# EAGLE board alu2 2 (EAGLE 7.5.0), part 1 of 2
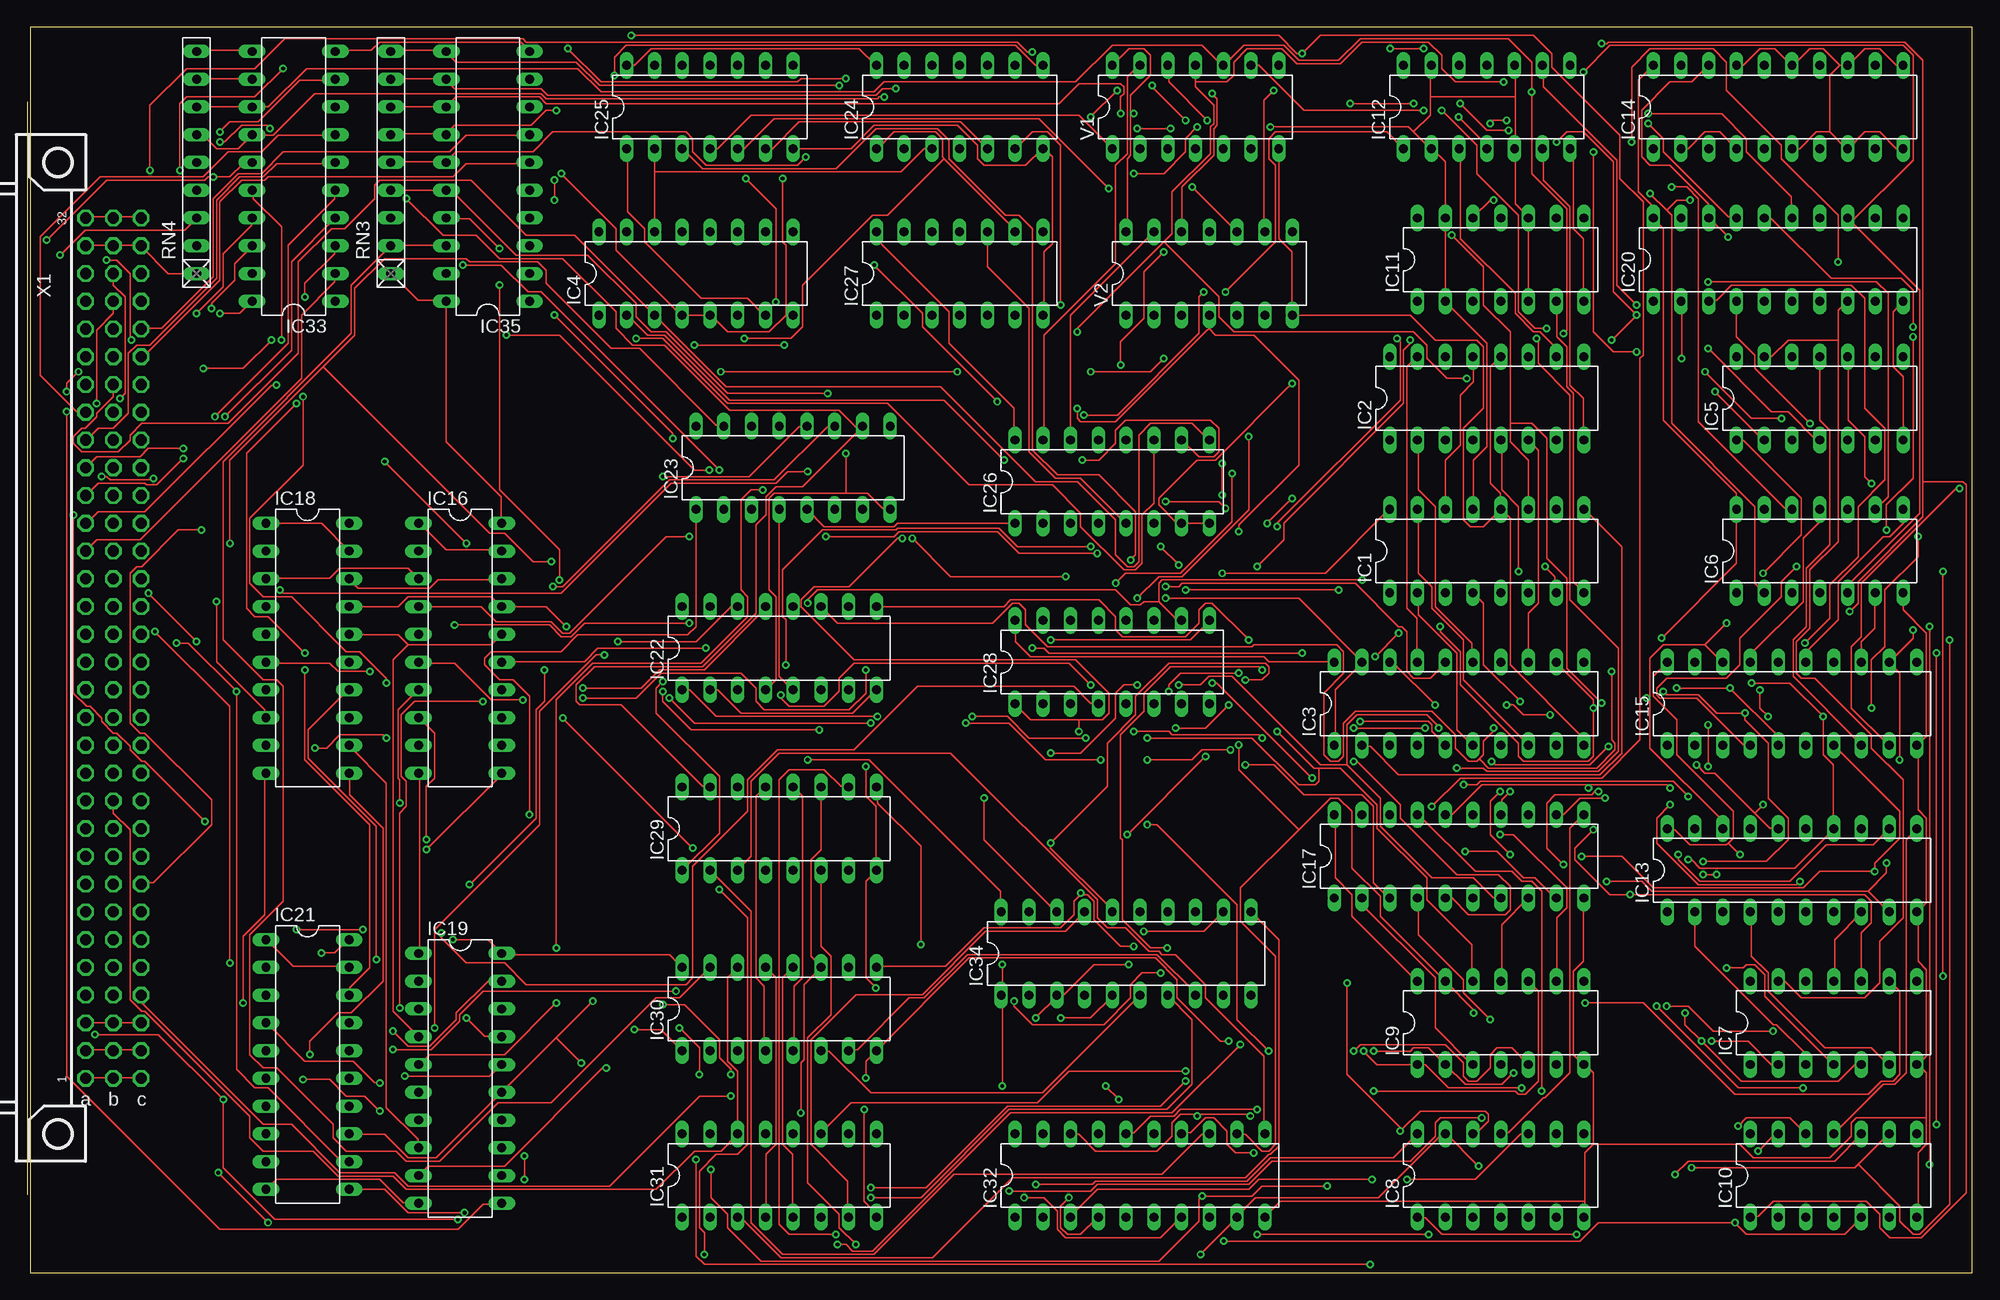
[diagram p0: board, top side]
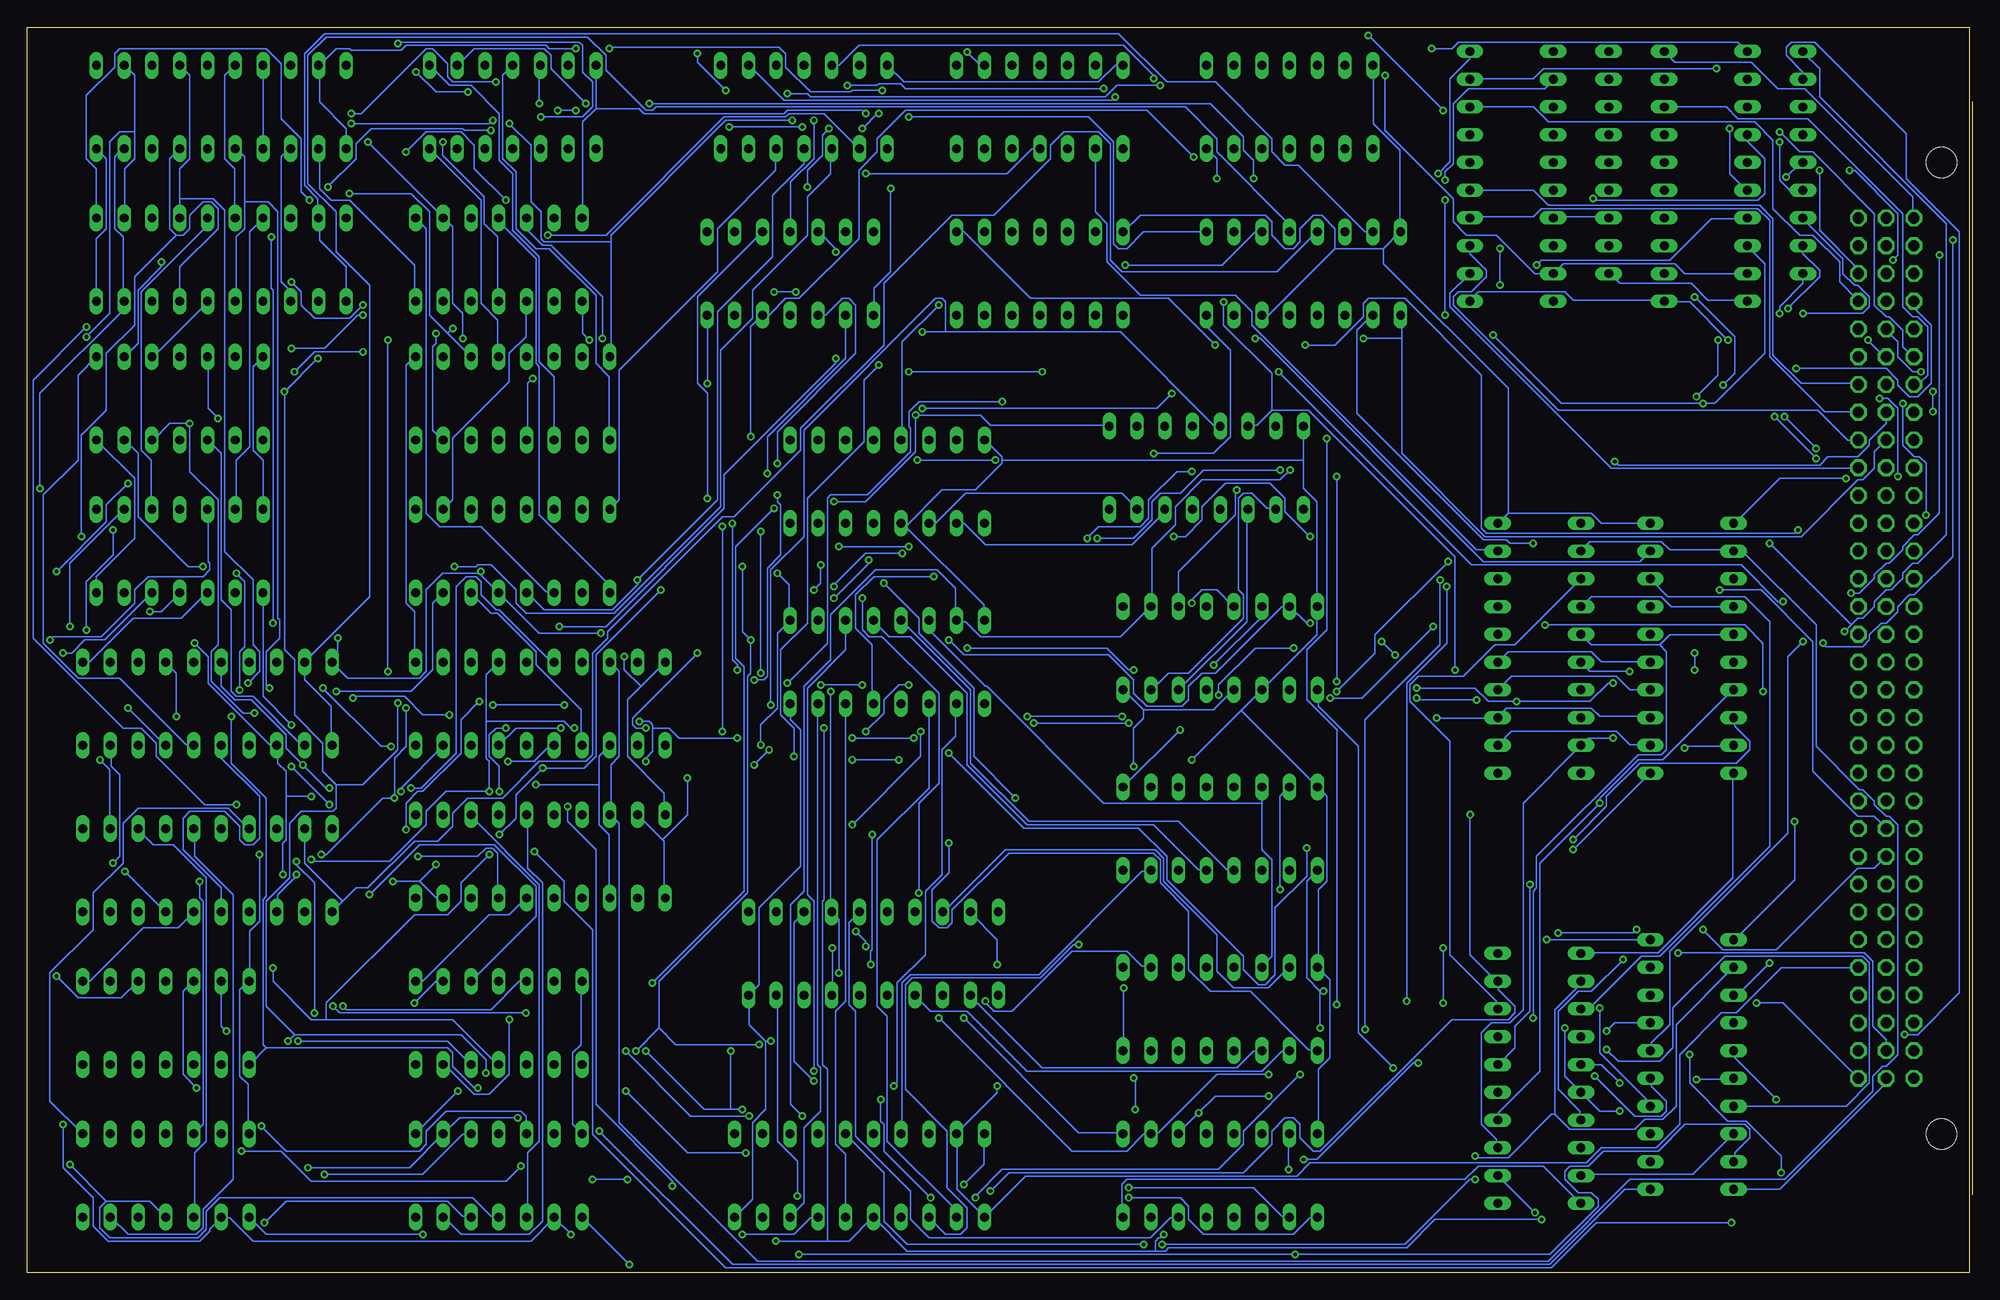
[diagram p1: board, bottom side, seen from below]

Size 177.78 x 113.97 mm. Coordinates in mm from the lower left corner, seen from the top.
Outline: 0,0 177.78,0 177.78,113.97 0,113.97 0,0
Copper layers (1*16): Top 0.0356mm / dielectric 1.5011mm / Bottom 0.0356mm
Design rules "LaenPCBOrder": minimum track width 6mil, minimum drill 13mil, track to track 6mil, track to pad 6mil, pad to pad 6mil, via to via 6mil, smd to smd 6mil, copper to edge 15mil, drill to drill 6mil, minimum pad ring 7mil, minimum via ring 7mil, stop-mask expansion 3mil, vias tented up to drill 0mil, thermal gap 10mil

## Footprints (pad centres in the part's own frame; a part is rotated, then mirrored left to right if it is on the bottom)
DIL16 = drill 0.813 long: 1 -8.89,-3.81; 2 -6.35,-3.81; 3 -3.81,-3.81; 4 -1.27,-3.81; 5 1.27,-3.81; 6 3.81,-3.81; 7 6.35,-3.81; 8 8.89,-3.81; 9 8.89,3.81; 10 6.35,3.81; 11 3.81,3.81; 12 1.27,3.81; 13 -1.27,3.81; 14 -3.81,3.81; 15 -6.35,3.81; 16 -8.89,3.81
DIL20 = drill 0.813 long: 1 -11.43,-3.81; 2 -8.89,-3.81; 3 -6.35,-3.81; 4 -3.81,-3.81; 5 -1.27,-3.81; 6 1.27,-3.81; 7 3.81,-3.81; 8 6.35,-3.81; 9 8.89,-3.81; 10 11.43,-3.81; 11 11.43,3.81; 12 8.89,3.81; 13 6.35,3.81; 14 3.81,3.81; 15 1.27,3.81; 16 -1.27,3.81; 17 -3.81,3.81; 18 -6.35,3.81; 19 -8.89,3.81; 20 -11.43,3.81
DIL14 = drill 0.813 long: 1 -7.62,-3.81; 2 -5.08,-3.81; 3 -2.54,-3.81; 4 0,-3.81; 5 2.54,-3.81; 6 5.08,-3.81; 7 7.62,-3.81; 8 7.62,3.81; 9 5.08,3.81; 10 2.54,3.81; 11 0,3.81; 12 -2.54,3.81; 13 -5.08,3.81; 14 -7.62,3.81
RN-9 = drill 0.813 long: 1 -10.16,0; 2 -7.62,0; 3 -5.08,0; 4 -2.54,0; 5 0,0; 6 2.54,0; 7 5.08,0; 8 7.62,0; 9 10.16,0
FABC96R = drill 1.016 octagon: A1 -2.54,39.37; A2 -2.54,36.83; A3 -2.54,34.29; A4 -2.54,31.75; A5 -2.54,29.21; A6 -2.54,26.67; A7 -2.54,24.13; A8 -2.54,21.59; A9 -2.54,19.05; A10 -2.54,16.51; A11 -2.54,13.97; A12 -2.54,11.43; A13 -2.54,8.89; A14 -2.54,6.35; A15 -2.54,3.81; A16 -2.54,1.27; A17 -2.54,-1.27; A18 -2.54,-3.81; A19 -2.54,-6.35; A20 -2.54,-8.89; A21 -2.54,-11.43; A22 -2.54,-13.97; A23 -2.54,-16.51; A24 -2.54,-19.05; A25 -2.54,-21.59; A26 -2.54,-24.13; A27 -2.54,-26.67; A28 -2.54,-29.21; A29 -2.54,-31.75; A30 -2.54,-34.29; A31 -2.54,-36.83; A32 -2.54,-39.37; B1 -5.08,39.37; B2 -5.08,36.83; B3 -5.08,34.29; B4 -5.08,31.75; B5 -5.08,29.21; B6 -5.08,26.67; B7 -5.08,24.13; B8 -5.08,21.59; B9 -5.08,19.05; B10 -5.08,16.51; B11 -5.08,13.97; B12 -5.08,11.43; B13 -5.08,8.89; B14 -5.08,6.35; B15 -5.08,3.81; B16 -5.08,1.27; B17 -5.08,-1.27; B18 -5.08,-3.81; B19 -5.08,-6.35; B20 -5.08,-8.89; B21 -5.08,-11.43; B22 -5.08,-13.97; B23 -5.08,-16.51; B24 -5.08,-19.05; B25 -5.08,-21.59; B26 -5.08,-24.13; B27 -5.08,-26.67; B28 -5.08,-29.21; B29 -5.08,-31.75; B30 -5.08,-34.29; B31 -5.08,-36.83; B32 -5.08,-39.37; C1 -7.62,39.37; C2 -7.62,36.83; C3 -7.62,34.29; C4 -7.62,31.75; C5 -7.62,29.21; C6 -7.62,26.67; C7 -7.62,24.13; C8 -7.62,21.59; C9 -7.62,19.05; C10 -7.62,16.51; C11 -7.62,13.97; C12 -7.62,11.43; C13 -7.62,8.89; C14 -7.62,6.35; C15 -7.62,3.81; C16 -7.62,1.27; C17 -7.62,-1.27; C18 -7.62,-3.81; C19 -7.62,-6.35; C20 -7.62,-8.89; C21 -7.62,-11.43; C22 -7.62,-13.97; C23 -7.62,-16.51; C24 -7.62,-19.05; C25 -7.62,-21.59; C26 -7.62,-24.13; C27 -7.62,-26.67; C28 -7.62,-29.21; C29 -7.62,-31.75; C30 -7.62,-34.29; C31 -7.62,-36.83; C32 -7.62,-39.37 | hole 2.794: 0,-44.456; 0,44.456

## Placement (x,y rotation side)
IC1  74LS83N  [DIL16]  133.35,66.04 0 top
IC2  74LS83N  [DIL16]  133.35,80.01 0 top
IC3  74LS244N  [DIL20]  130.81,52.07 0 top
IC4  74LS138N  [DIL16]  60.96,91.44 0 top
IC5  74LS32N  [DIL14]  163.83,80.01 0 top
IC6  74LS32N  [DIL14]  163.83,66.04 0 top
IC7  74LS08N  [DIL14]  165.1,22.86 0 top
IC8  74LS86N  [DIL14]  134.62,8.89 0 top
IC9  74LS86N  [DIL14]  134.62,22.86 0 top
IC10  74LS08N  [DIL14]  165.1,8.89 0 top
IC11  74LS86N  [DIL14]  134.62,92.71 0 top
IC12  74LS86N  [DIL14]  133.35,106.68 0 top
IC13  74LS244N  [DIL20]  161.29,36.83 0 top
IC14  74LS244N  [DIL20]  160.02,106.68 0 top
IC15  74LS244N  [DIL20]  161.29,52.07 0 top
IC16  74LS240N  [DIL20]  39.37,57.15 270 top
IC17  74LS244N  [DIL20]  130.81,38.1 0 top
IC18  74LS244N  [DIL20]  25.4,57.15 270 top
IC19  74LS374N  [DIL20]  39.37,17.78 270 top
IC20  74LS244N  [DIL20]  160.02,92.71 0 top
IC21  74LS244N  [DIL20]  25.4,19.05 270 top
IC22  74LS85N  [DIL16]  68.58,57.15 0 top
IC23  74LS85N  [DIL16]  69.85,73.66 0 top
IC24  74ALS04N  [DIL14]  85.09,106.68 0 top
IC25  74LS32N  [DIL14]  62.23,106.68 0 top
IC26  74LS251N  [DIL16]  99.06,72.39 0 top
IC27  74LS86N  [DIL14]  85.09,91.44 0 top
IC28  74LS192N  [DIL16]  99.06,55.88 0 top
IC29  74LS192N  [DIL16]  68.58,40.64 0 top
IC30  74LS192N  [DIL16]  68.58,24.13 0 top
IC31  74LS192N  [DIL16]  68.58,8.89 0 top
IC32  74LS244N  [DIL20]  101.6,8.89 0 top
IC33  74LS245N  [DIL20]  24.13,100.33 90 top
IC34  74LS244N  [DIL20]  100.33,29.21 0 top
IC35  74LS245N  [DIL20]  41.91,100.33 90 top
RN3  [RN-9]  33.02,101.6 90 top
RN4  [RN-9]  15.24,101.6 90 top
V1  744078N  [DIL14]  106.68,106.68 0 top
V2  744078N  [DIL14]  107.95,91.44 0 top
X1  FABC96R  [FABC96R]  2.54,57.15 180 top

## Library data of the parts
IC1-IC35 = 74xx-us
RN3 RN4 = resistor-net; OC_FARNELL: unknown; OC_NEWARK: unknown
V1 V2 = 74ttl-din
X1 = con-vg

## Nets
+12V: X1.A3 X1.B3 X1.C3
-SUB: IC1.13 IC11.2 IC11.5 IC11.10 IC11.13 IC12.2 IC12.5 IC12.10 IC12.13 IC24.4
AC-IN-INV: IC18.1 IC18.19 IC24.1 IC27.9 X1.B30
ACI-DATA0: IC16.18 IC18.18 IC19.3
ACI-DATA1: IC16.16 IC18.16 IC19.4
ACI-DATA2: IC16.14 IC18.14 IC19.7
ACI-DATA3: IC16.12 IC18.12 IC19.8
ACI-DATA4: IC16.9 IC18.9 IC19.13
ACI-DATA5: IC16.7 IC18.7 IC19.14
ACI-DATA6: IC16.5 IC18.5 IC19.17
ACI-DATA7: IC16.3 IC18.3 IC19.18
ACO-DATA0: IC5.1 IC7.1 IC9.1 IC11.1 IC19.2 IC21.2 IC22.9
ACO-DATA1: IC5.4 IC7.4 IC9.4 IC11.4 IC19.5 IC21.4 IC22.11
ACO-DATA2: IC5.9 IC7.9 IC9.9 IC11.9 IC19.6 IC21.6 IC22.14
ACO-DATA3: IC5.12 IC7.12 IC9.12 IC11.12 IC19.9 IC21.8 IC22.1
ACO-DATA4: IC6.1 IC8.12 IC10.12 IC12.1 IC19.12 IC21.11 IC23.9
ACO-DATA5: IC6.4 IC8.1 IC10.1 IC12.4 IC19.15 IC21.13 IC23.11
ACO-DATA6: IC6.9 IC8.4 IC10.4 IC12.9 IC19.16 IC21.15 IC23.14
ACO-DATA7: IC6.12 IC8.9 IC10.9 IC12.12 IC19.19 IC21.17 IC23.1
ADD: IC4.7 IC25.1
ADDR0: X1.A4
ADDR1: X1.A5
ADDR2: X1.A6
ADDR3: X1.A7
ADDR4: X1.A8
ADDR5: X1.A9
ADDR6: X1.A10
ADDR7: X1.A11
ADDR8: X1.A12
ADDR9: X1.A13
ADDR10: X1.A14
ADDR11: X1.A15
ADDR12: X1.A16
ADDR13: X1.A17
ADDR14: X1.A18
ADDR15: X1.A19
ADDR-REG-CLK: X1.B4
ADDR-REG-OUT: X1.B8
ALU0: IC4.1 IC26.11 X1.B24
ALU1: IC4.2 IC26.10 X1.B25
ALU2: IC4.3 IC26.9 X1.B26
ALU-FUNC: IC24.9 X1.B27
AND: IC4.13 IC13.1 IC13.19
BDATA0: IC1.11 IC5.2 IC7.2 IC9.2 IC20.2 IC21.18 IC22.10 IC28.15 IC32.18 IC33.18 RN4.2 V1.2
BDATA1: IC1.7 IC5.5 IC7.5 IC9.5 IC20.4 IC21.16 IC22.12 IC28.1 IC32.16 IC33.17 RN4.3 V1.3
BDATA2: IC1.4 IC5.10 IC7.10 IC9.10 IC20.6 IC21.14 IC22.13 IC28.10 IC32.14 IC33.16 RN4.4 V1.4
BDATA3: IC1.16 IC5.13 IC7.13 IC9.13 IC20.8 IC21.12 IC22.15 IC28.9 IC32.12 IC33.15 RN4.5 V1.5
BDATA4: IC2.11 IC6.2 IC8.13 IC10.13 IC20.11 IC21.9 IC23.10 IC29.15 IC32.9 IC33.14 RN4.6 V1.9
BDATA5: IC2.7 IC6.5 IC8.2 IC10.2 IC20.13 IC21.7 IC23.12 IC29.1 IC32.7 IC33.13 RN4.7 V1.10
BDATA6: IC2.4 IC6.10 IC8.5 IC10.5 IC20.15 IC21.5 IC23.13 IC29.10 IC32.5 IC33.12 RN4.8 V1.11
BDATA7: IC2.16 IC6.13 IC8.10 IC10.10 IC20.17 IC21.3 IC23.15 IC29.9 IC32.3 IC33.11 RN4.9 V1.12
BDATA8: IC30.15 IC34.18 IC35.18 RN3.2 V2.2
BDATA9: IC30.1 IC34.16 IC35.17 RN3.3 V2.3
BDATA10: IC30.10 IC34.14 IC35.16 RN3.4 V2.4
BDATA11: IC30.9 IC34.12 IC35.15 RN3.5 V2.5
BDATA12: IC31.15 IC34.9 IC35.14 RN3.6 V2.9
BDATA13: IC31.1 IC34.7 IC35.13 RN3.7 V2.10
BDATA14: IC31.10 IC34.5 IC35.12 RN3.8 V2.11
BDATA15: IC31.9 IC34.3 IC35.11 RN3.9 V2.12
BR-COND: IC27.8 X1.C8
BR-REG-LD: X1.C6
BR-REG-OUT: X1.C7
BRD-ADDR-REG0: X1.B5
BRD-ADDR-REG1: X1.B6
BRD-IN-ID0: X1.B18
BRD-IN-ID1: X1.B19
BRD-OUT-ID0: X1.B14
BRD-OUT-ID1: X1.B15
DATA: IC4.15 IC20.1 IC20.19
DATA0: IC33.2 X1.A20
DATA1: IC33.3 X1.A21
DATA2: IC33.4 X1.A22
DATA3: IC33.5 X1.A23
DATA4: IC33.6 X1.A24
DATA5: IC33.7 X1.A25
DATA6: IC33.8 X1.A26
DATA7: IC33.9 X1.A27
DATA8: IC35.2 X1.C23
DATA9: IC35.3 X1.C24
DATA10: IC35.4 X1.C25
DATA11: IC35.5 X1.C26
DATA12: IC35.6 X1.C27
DATA13: IC35.7 X1.C28
DATA14: IC35.8 X1.C29
DATA15: IC35.9 X1.C30
DATA-REG-IN-ID0: X1.B16
DATA-REG-IN-ID1: X1.B17
DATA-REG-OUT-ID0: X1.B12
DATA-REG-OUT-ID1: X1.B13
DATA-REG-RD-HI: X1.B22
DATA-REG-RD-LO: X1.B20
DATA-REG-WR-HI: X1.B23
DATA-REG-WR-LO: X1.B21
DIR: IC33.1 IC35.1 X1.A29
GND: IC1.12 IC2.12 IC3.10 IC4.4 IC4.5 IC4.8 IC5.7 IC6.7 IC7.7 IC8.7 IC9.7 IC10.7 IC11.7 IC12.7 IC13.10 IC14.2 IC14.4 IC14.6 IC14.8 IC14.10 IC14.11 IC14.13 IC14.15 IC14.17 IC15.10 IC16.10 IC17.10 IC18.10 IC19.1 IC19.10 IC20.10 IC21.10 IC22.2 IC22.4 IC22.8 IC23.8 IC24.7 IC25.7 IC26.7 IC26.8 IC27.7 IC28.8 IC29.8 IC30.8 IC31.8 IC32.10 IC33.10 IC34.10 IC35.10 V1.7 V2.7 X1.A1 X1.A32 X1.B1 X1.B32 X1.C1 X1.C32
H/L-SWAP: X1.A30
I/D-REG-DN: IC28.4 X1.B9
I/D-REG-LD: IC28.11 IC29.11 IC30.11 IC31.11 X1.C4
I/D-REG-OUT: IC32.1 IC32.19 IC34.1 IC34.19 X1.C5
I/D-REG-UP: IC28.5 X1.B10
INV-IN0: IC3.18 IC13.18 IC14.18 IC15.18 IC16.2 IC17.18 IC18.2 IC20.18
INV-IN1: IC3.16 IC13.16 IC14.16 IC15.16 IC16.4 IC17.16 IC18.4 IC20.16
INV-IN2: IC3.14 IC13.14 IC14.14 IC15.14 IC16.6 IC17.14 IC18.6 IC20.14
INV-IN3: IC3.12 IC13.12 IC14.12 IC15.12 IC16.8 IC17.12 IC18.8 IC20.12
INV-IN4: IC3.9 IC13.9 IC14.9 IC15.9 IC16.11 IC17.9 IC18.11 IC20.9
INV-IN5: IC3.7 IC13.7 IC14.7 IC15.7 IC16.13 IC17.7 IC18.13 IC20.7
INV-IN6: IC3.5 IC13.5 IC14.5 IC15.5 IC16.15 IC17.5 IC18.15 IC20.5
INV-IN7: IC3.3 IC13.3 IC14.3 IC15.3 IC16.17 IC17.3 IC18.17 IC20.3
LD-AC: IC19.11 X1.B28
N$1: IC5.3 IC15.2
N$2: IC5.6 IC15.4
N$3: IC5.8 IC15.6
N$4: IC5.11 IC15.8
N$5: IC6.3 IC15.11
N$6: IC6.6 IC15.13
N$7: IC6.8 IC15.15
N$8: IC6.11 IC15.17
N$9: IC7.3 IC13.2
N$10: IC7.6 IC13.4
N$11: IC7.8 IC13.6
N$12: IC7.11 IC13.8
N$13: IC10.11 IC13.11
N$14: IC10.3 IC13.13
N$15: IC10.6 IC13.15
N$16: IC10.8 IC13.17
N$17: IC9.3 IC17.2
N$18: IC9.6 IC17.4
N$19: IC9.8 IC17.6
N$20: IC9.11 IC17.8
N$21: IC8.11 IC17.11
N$22: IC8.3 IC17.13
N$23: IC8.6 IC17.15
N$24: IC8.8 IC17.17
N$25: IC1.8 IC11.6
N$26: IC1.3 IC11.8
N$27: IC1.1 IC11.11
N$28: IC1.10 IC11.3
N$29: IC2.10 IC12.3
N$30: IC2.8 IC12.6
N$31: IC2.3 IC12.8
N$32: IC2.1 IC12.11
N$33: IC1.9 IC3.2
N$34: IC1.6 IC3.4
N$35: IC1.2 IC3.6
N$36: IC1.15 IC3.8
N$37: IC2.9 IC3.11
N$38: IC2.6 IC3.13
N$39: IC2.2 IC3.15
N$40: IC2.15 IC3.17
N$41: IC1.14 IC2.13
N$42: IC16.1 IC16.19 IC24.2
N$43: IC22.5 IC23.4
N$44: IC3.1 IC3.19 IC25.3
N$45: IC22.6 IC23.3
N$46: IC22.7 IC23.2
N$47: IC23.7 IC26.3
N$48: IC23.6 IC26.2
N$49: IC23.5 IC26.1
N$50: IC25.4 V1.1
N$51: IC26.15 V1.13
N$52: IC26.14 V2.13
N$53: IC25.5 V2.1
N$54: IC24.5 IC25.6
N$55: IC24.6 IC26.13
N$56: IC26.5 IC27.10
N$57: IC24.8 IC33.19 IC35.19
N$58: IC28.13 IC29.4
N$59: IC28.12 IC29.5
N$60: IC29.13 IC30.4
N$61: IC29.12 IC30.5
N$62: IC30.13 IC31.4
N$63: IC30.12 IC31.5
OR: IC4.12 IC15.1 IC15.19
OVERFLOW: IC26.12
R1D0: IC28.7 IC32.8
R1D1: IC28.6 IC32.6
R1D2: IC28.2 IC32.4
R1D3: IC28.3 IC32.2
R1D4: IC29.7 IC32.17
R1D5: IC29.6 IC32.15
R1D6: IC29.2 IC32.13
R1D7: IC29.3 IC32.11
R1D8: IC30.7 IC34.8
R1D9: IC30.6 IC34.6
R1D10: IC30.2 IC34.4
R1D11: IC30.3 IC34.2
R1D12: IC31.7 IC34.17
R1D13A: IC31.6 IC34.15
R1D14: IC31.2 IC34.13
R1D15: IC31.3 IC34.11
RD-AC: IC21.1 IC21.19 X1.B29
RESET: IC28.14 IC29.14 IC30.14 IC31.14 X1.B11
SP/PC-ADDR-OUT: X1.C19
SP/PC-DATA-OUT-HI: X1.C18
SP/PC-DATA-OUT-LO: X1.C17
SP/PC-DN: X1.C21
SP/PC-LD: X1.C20
SP/PC-SEL: X1.C16
SP/PC-UP: X1.C22
SUB: IC4.14 IC24.3 IC25.2
VCC: IC1.5 IC2.5 IC3.20 IC4.6 IC4.16 IC5.14 IC6.14 IC7.14 IC8.14 IC9.14 IC10.14 IC11.14 IC12.14 IC13.20 IC14.20 IC15.20 IC16.20 IC17.20 IC18.20 IC19.20 IC20.20 IC21.20 IC22.3 IC22.16 IC23.16 IC24.14 IC25.14 IC26.4 IC26.16 IC27.14 IC28.16 IC29.16 IC30.16 IC31.16 IC32.20 IC33.20 IC34.20 IC35.20 RN3.1 RN4.1 V1.14 V2.14 X1.A2 X1.A31 X1.B2 X1.B31 X1.C2 X1.C31
XOR: IC4.11 IC17.1 IC17.19
ZERO: IC4.9 IC14.1 IC14.19

## Tracks (layer width: path | path; a pad name or v marks a point on that pad's centre or on a via)
+12V
  Top 0.152: X1.A3 X1.B3 X1.C3
-SUB  (via drill 0.33)
  Top 0.152: IC1.13 132.13,69.95 132.13,74.37 133.35,75.59 133.35,85.04 129.54,88.85 IC11.2 IC11.13 129.54,101.65 128.32,102.87 IC12.2 128.17,102.87 126.64,104.39 | IC11.5 IC11.10 137.16,96.62 135.94,97.84 135.94,102.87 | 135.94,102.87 135.94,107.59 | 135.94,107.59 135.94,110.49 IC12.10 | 135.94,102.87 IC12.5 | v101.04,100.58 103.78,100.58 105.77,102.56 105.77,103.78 v106.83,104.85 | v113.54,104.85 126.19,104.85 126.64,104.39 | 128.17,107.59 128.17,105.92 126.64,104.39 | 128.17,107.59 128.17,110.49 IC12.13 | 128.17,107.59 135.94,107.59
  Bottom 0.152: IC24.4 85.8,102.87 88.09,100.58 v101.04,100.58 | v113.54,104.85 v106.83,104.85
AC-IN-INV  (via drill 0.33)
  Top 0.152: 83.67,101.96 83.52,102.11 83.52,103.78 82.91,104.39 79.1,104.39 77.57,102.87 IC24.1 | 83.67,101.96 90.07,95.56 90.07,95.25 IC27.9 | IC18.1 26.67,68.58 IC18.19 | X1.B30 7.62,90.37 8.69,89.31 8.69,80.47 v8.23,80.01 | v6.55,72.85 7.01,72.85 7.32,72.54 11.12,72.54 v11.28,72.69 | 83.67,101.96 78.49,96.77 77.11,96.77 70.71,90.37 70.71,86.56 69.65,85.5 v65.38,85.5
  Bottom 0.152: v8.23,80.01 7.47,80.01 6.55,79.1 v6.55,72.85 | v11.28,72.69 17.37,72.69 21.49,68.58 IC18.1 | v65.38,85.5 64.92,85.5 44.5,65.08 30.18,65.08 IC18.19
ACI-DATA0
  Top 0.152: IC16.18 43.13,63.4 37.34,63.4 36.58,62.64 30.02,62.64 29.26,63.4 IC18.18
  Bottom 0.152: IC18.18 27.58,61.87 20.57,61.87 18.29,59.59 18.29,39.01 28.35,28.96 30.02,28.96 34.75,24.23 35.51,24.23 IC19.3
ACI-DATA1
  Top 0.152: 34.59,57.45 33.68,58.37 29.26,58.37 IC18.16 | 34.59,57.45 42.22,57.45 IC16.16 | IC19.4 33.22,23.93 33.22,56.08 34.59,57.45
ACI-DATA2  (via drill 0.33)
  Top 0.152: v31.7,28.65 31.7,40.84 25.45,47.09 25.45,49.68 29.11,53.34 IC18.14
  Bottom 0.152: IC18.14 31.09,53.34 32.31,54.56 41.91,54.56 43.13,53.34 IC16.14 | v31.7,28.65 34.59,25.76 35.81,25.76 37.64,23.93 37.64,16.76 35.66,14.78 35.66,14.02 IC19.7
ACI-DATA3
  Top 0.152: IC19.8 35.51,11.43 35.51,12.19 32.61,15.09 32.61,44.81 29.26,48.16 IC18.12
  Bottom 0.152: IC16.12 41.91,49.53 32.31,49.53 31.09,48.31 29.26,48.31 IC18.12
ACI-DATA4  (via drill 0.33)
  Top 0.152: v26.06,48.01 27.13,48.01 28.35,49.23 32.31,49.23 v32.61,48.92
  Bottom 0.152: IC19.13 43.28,11.43 43.28,12.19 44.65,13.56 44.65,21.95 43.74,22.86 42.06,22.86 40.84,24.08 40.84,42.98 IC16.9 34.9,48.92 v32.61,48.92 | v26.06,48.01 25.91,48.16 21.64,48.16 IC18.9
ACI-DATA5  (via drill 0.33)
  Top 0.152: v33.83,42.98 33.83,45.11 33.68,45.26 33.68,51.51 35.51,53.34 IC16.7
  Bottom 0.152: IC18.7 21.64,53.34 28.04,46.94 30.33,46.94 33.83,43.43 v33.83,42.98 39.32,37.49 39.32,18.44 43.13,14.63 43.13,14.02 IC19.14
ACI-DATA6  (via drill 0.33)
  Top 0.152: v39.93,23.32 41.6,21.64 43.13,21.64 IC19.17
  Bottom 0.152: 28.35,57.45 27.43,58.37 21.64,58.37 IC18.5 | 28.35,57.45 34.59,57.45 IC16.5 | v39.93,23.32 39.93,34.9 39.62,35.2 39.62,38.1 30.33,47.4 28.19,47.4 27.74,47.85 27.74,56.84 28.35,57.45
ACI-DATA7
  Top 0.152: IC16.3 34.59,64.47 28.35,64.47 27.43,63.55 21.64,63.55 IC18.3
  Bottom 0.152: IC16.3 41.6,57.45 43.43,57.45 46.33,54.56 50.44,54.56 51.21,53.8 51.21,52.27 47.55,48.62 47.55,29.11 43.28,24.84 43.28,24.23 IC19.18
ACO-DATA0  (via drill 0.33)
  Top 0.152: v136.55,16.92 129.84,16.92 127.71,19.05 IC9.1 123.29,19.05 v122.07,20.27 | IC22.9 89.15,60.96 89.76,61.57 97.84,61.57 99.36,60.05 99.36,58.83 99.97,58.22 105.77,58.22 106.98,59.44 106.98,60.66 107.59,61.27 108.2,61.27 v111.56,57.91 | IC5.1 156.82,76.2 162.15,70.87 162.15,67.51 v158.65,64.01 | v158.34,53.34 158.34,51.66 v159.11,50.9 | v126.34,85.34 126.34,85.04 125.73,84.43 125.73,79.55 114.76,68.58 114.76,67.06 v112.32,64.62 | v45.26,8.53 v45.26,10.67 | v73.91,2.59 74.68,2.59 75.29,1.98 77.11,1.98 89.76,14.63 104.55,14.63 v110.8,20.88
  Bottom 0.152: 37.95,14.48 37.95,24.08 35.66,26.36 35.66,26.67 IC19.2 | 37.95,14.48 36.58,13.11 30.63,13.11 29.72,14.02 28.04,14.02 26.82,15.24 26.82,22.71 IC21.2 | v136.55,16.92 136.85,16.92 138.84,18.9 138.84,20.12 139.29,20.57 155.91,20.57 | 155.91,20.57 157.43,19.05 IC7.1 | 119.94,22.4 119.94,26.67 111.86,34.75 111.86,54.56 111.56,54.86 v111.56,57.91 112.32,58.67 v112.32,64.62 | v122.07,20.27 119.94,22.4 | v158.65,64.01 157.89,63.25 157.89,57.3 158.34,56.84 v158.34,53.34 | v159.11,50.9 159.11,46.63 155.91,43.43 155.91,34.44 156.21,34.14 156.21,20.88 155.91,20.57 | v126.34,85.34 126.95,85.95 126.95,88.85 IC11.1 | 37.95,14.48 38.25,14.48 42.22,10.52 45.11,10.52 v45.26,10.67 | v45.26,8.53 45.72,8.53 51.66,2.59 v73.91,2.59 | v110.8,20.88 118.42,20.88 119.94,22.4
ACO-DATA1  (via drill 0.33)
  Top 0.152: v139.75,103.48 140.66,104.39 142.19,104.39 144.93,101.65 144.93,89.76 v147.07,87.63 v144.78,85.34 | v153.62,84.58 159.41,78.79 160.93,78.79 163.53,76.2 IC5.4 | v155.3,27.89 156.82,27.89 157.12,28.19 157.89,28.19 158.8,27.28 158.8,25.3 165.05,19.05 IC7.4 | v32,17.37 31.55,17.37 29.57,19.36 25.15,19.36 21.64,22.86 IC21.4 | v67.06,71.63 65.99,71.63 65.08,70.71 65.08,62.48 65.68,61.87 65.68,60.05 61.42,55.78 51.51,55.78 48.16,52.43 v48.16,29.72 | v48.16,24.69 43.43,19.96 36.58,19.96 35.66,19.05 IC19.5 | v135.48,38.25 133.66,40.08 133.66,43.13 v134.57,44.04 | v133.96,49.84 133.96,49.53 133.04,48.62 133.04,47.4 132.59,46.94 | 132.59,46.94 132.44,46.79 131.67,46.79 130.45,48.01 130.45,49.23 128.32,51.36 121.31,51.36 120.24,50.29 120.24,47.24 119.79,46.79 119.02,46.79 118.42,47.4 118.42,53.03 120.24,54.86 120.24,56.84 119.63,57.45 112.01,57.45 111.86,57.3 93.12,57.3 91.14,59.28 91.14,60.66 90.53,61.27 89.92,61.27 88.09,59.44 73.91,59.44 IC22.11 | v144.78,55.02 144.78,48.77 145.09,48.46 145.09,47.85 143.41,46.18 133.5,46.18 132.74,46.94 132.59,46.94
  Bottom 0.152: v139.75,103.48 139.75,102.26 135.94,98.45 135.94,96.01 134.72,94.79 134.72,89 IC11.4 | v147.07,87.63 147.52,87.63 150.57,84.58 v153.62,84.58 | 150.42,23.16 151.79,23.16 155.3,26.67 v155.3,27.89 | 150.42,23.16 138.84,23.16 134.72,19.05 IC9.4 | IC19.5 33.68,19.05 v32,17.37 | IC22.11 72.39,64.16 67.21,69.34 67.21,71.48 v67.06,71.63 | v48.16,24.69 v48.16,29.72 | 150.42,23.16 150.42,24.69 142.34,32.77 139.29,32.77 138.07,33.98 138.07,35.66 v135.48,38.25 | v134.57,44.04 134.57,46.33 135.48,47.24 135.48,49.23 134.87,49.84 v133.96,49.84 | v144.78,55.02 v144.78,85.34
ACO-DATA2  (via drill 0.33)
  Top 0.152: v24.99,17.68 27.43,17.68 28.96,16.15 30.63,16.15 v32,14.78 | IC22.14 64.16,60.96 60.96,57.76 v53.8,57.76 | v52.58,56.54 51.82,56.54 46.63,51.36 46.63,41 37.03,31.39 v37.03,22.4 | v142.34,24.69 147.68,24.69 156.06,16.31 168.25,16.31 169.47,17.53 170.54,17.53 171.15,18.14 171.15,25.76 170.23,26.67 IC7.9 | v146.61,103.48 146.61,110.34 148.28,112.01 154.08,112.01 155.3,110.8 155.3,108.2 160.32,103.17 160.32,101.96 165.51,96.77 v165.51,92.51 | v134.57,40.08 135.79,40.08 140.66,35.2 140.66,33.38 139.75,32.46 139.75,26.67 IC9.9 | v130.61,46.18 133.04,46.18 133.35,45.87 143.56,45.87 145.39,47.7 145.39,57.15 140.97,61.57 140.97,80.31 138.07,83.21 138.07,85.34 v137.92,85.5 | v69.19,55.63 69.19,59.74 68.89,60.05 68.89,64.31 72.54,67.97 79.25,67.97 79.4,68.12 88.7,68.12 90.37,66.45 v97.08,66.45 | v105.16,64.77 v103.48,66.45 | v119.79,62.48 v105.77,62.48
  Bottom 0.152: v24.99,17.68 21.64,17.68 IC21.6 | v32,14.78 33.83,14.78 IC19.6 37.03,17.98 v37.03,22.4 | v52.58,56.54 v53.8,57.76 | IC9.9 140.36,26.67 v142.34,24.69 | v146.61,103.48 139.75,96.62 IC11.9 139.6,96.47 138.84,95.71 138.84,88.7 137.92,87.78 v137.92,85.5 | v165.51,92.51 165.51,92.05 167.64,89.92 167.64,85.04 168.86,83.82 IC5.9 | v134.57,40.08 133.04,41.6 133.04,43.74 v130.61,46.18 126.8,46.18 125.73,47.24 125.73,56.54 v119.79,62.48 | IC22.14 64.77,60.05 v69.19,55.63 | v103.48,66.45 v97.08,66.45 | v105.16,64.77 105.16,63.09 v105.77,62.48
ACO-DATA3  (via drill 0.33)
  Top 0.152: v52.73,18.75 52.43,18.75 43.43,9.75 36.42,9.75 IC19.9 | v148.9,24.38 156.36,16.92 v162.31,16.92 | v160.32,78.18 157.58,78.18 v153.31,82.45 | v147.07,84.28 144.93,84.28 143.1,86.11 v143.1,102.56 | v133.96,98.15 133.66,98.15 132.13,96.62 IC11.12 | 117.96,46.18 117.5,46.18 v114.15,49.53 | 117.96,46.18 119.94,46.18 123.29,42.82 123.29,40.69 127.86,36.12 127.86,34.14 131.98,30.02 131.98,26.67 IC9.12 | v114.15,68.28 114.15,68.58 125.42,79.86 125.42,85.19 v125.12,85.5 | IC22.1 60.35,53.34 62.79,50.9 v77.57,50.9 | v86.26,50.9 89.46,50.9 91.44,48.92 v96.62,48.92 | v102.26,48.92 111.86,48.92 116.13,44.65 117.65,44.65 117.96,44.96 117.96,46.18
  Bottom 0.152: IC21.8 25.3,8.99 35.51,8.99 IC19.9 | v52.73,18.75 55.93,21.95 55.93,48.16 59.59,51.82 59.59,53.34 IC22.1 | IC9.12 132.74,26.67 135.33,24.08 148.59,24.08 v148.9,24.38 | v162.31,16.92 163.53,18.14 163.53,25.76 162.61,26.67 IC7.12 | v160.32,78.18 161.24,79.1 161.24,83.82 IC5.12 | v153.31,82.45 151.49,84.28 v147.07,84.28 | v143.1,102.56 141.28,104.39 138.07,104.39 136.85,103.17 136.85,101.04 v133.96,98.15 | v114.15,68.28 v114.15,49.53 | v125.12,85.5 125.12,89.31 129.84,94.03 130.61,94.03 131.98,95.4 131.98,96.47 IC11.12 | v86.26,50.9 v77.57,50.9 | v102.26,48.92 v96.62,48.92
ACO-DATA4  (via drill 0.33)
  Top 0.152: v96.47,78.49 99.52,78.49 106.98,85.95 106.98,89.31 v107.44,89.76 | v109.42,89.76 114,94.34 114,101.35 113.39,101.96 113.39,103.78 114,104.39 124.21,104.39 IC12.1 | IC21.11 32.46,7.62 34.59,5.49 v39.78,5.49 | v156.36,13.41 157.12,14.17 161.09,14.17 IC10.12 | v153.62,46.33 v153.62,50.14 | v150.11,42.82 148.9,41.6 148.9,39.32 152.71,35.51 161.7,35.51 v162,35.81 | 125.58,13.11 127.25,14.78 133.2,14.78 133.5,14.48 133.5,13.87 132.44,12.8 132.13,12.8 IC8.12 | v103.94,70.56 108.81,70.56 v109.42,69.95 | v120.55,26.52 120.55,18.14 125.58,13.11 | 125.58,13.11 v125.42,12.95
  Bottom 0.152: v109.42,89.76 v107.44,89.76 | IC23.9 78.79,77.57 89.61,77.57 90.53,78.49 v96.47,78.49 96.47,75.13 101.04,70.56 v103.94,70.56 | IC19.12 v39.78,5.49 | v156.36,13.41 154.08,11.12 141.88,11.12 141.28,11.73 141.28,12.95 139.45,14.78 132.59,14.78 132.13,14.33 132.13,12.8 IC8.12 | IC6.1 156.21,52.73 v153.62,50.14 | v150.11,42.82 v153.62,46.33 | v162,35.81 162,34.29 161.7,33.98 161.7,13.56 IC10.12 | IC21.11 31.55,7.62 38.41,0.76 113.23,0.76 v125.42,12.95 | v109.42,69.95 112.93,66.45 112.93,56.24 112.17,55.47 112.17,34.9 v120.55,26.52
ACO-DATA5  (via drill 0.33)
  Top 0.152: IC21.13 29.26,12.65 32.46,12.65 34.59,10.52 37.19,10.52 IC19.15 48.16,21.49 | v47.85,62.79 48.77,62.79 58.52,72.54 68.12,72.54 73,77.42 73.61,77.42 IC23.11 | 48.16,21.49 v51.51,24.84 | v141.58,3.5 129.24,3.5 127.71,5.03 127.1,5.03 IC8.1 | IC12.4 133.35,103.17 v130.76,105.77 | v143.87,112.47 144.32,112.47 144.47,112.62 171.6,112.62 173.28,110.95 173.28,72.39 | 173.28,72.39 173.28,69.19 167.34,63.25 167.34,61.27 v166.57,60.5 | 173.28,72.39 176.94,72.39 177.24,72.08 177.24,7.32 173.13,3.2 170.23,3.2 169.32,4.12 169.32,5.33 168.1,6.55 159.56,6.55 158.19,5.18 157.58,5.18 IC10.1 | v50.44,19.2 48.16,21.49 | v60.96,10.36 60.96,1.52 61.72,0.76 v122.68,0.76
  Bottom 0.152: v47.85,62.79 47.85,57.61 51.51,53.95 v51.51,24.84 | v141.58,3.5 155.91,3.5 IC10.1 | v130.76,105.77 126.95,105.77 126.03,106.68 126.03,108.97 126.95,109.88 126.95,112.32 127.25,112.62 143.71,112.62 v143.87,112.47 | v166.57,60.5 165.51,60.5 163.83,62.18 IC6.4 | v50.44,19.2 50.9,19.2 59.74,10.36 v60.96,10.36 | IC8.1 v122.68,0.76
ACO-DATA6  (via drill 0.33)
  Top 0.152: v34.29,17.98 42.06,17.98 43.13,19.05 IC19.16 | v47.09,55.17 47.09,52.27 46.33,51.51 46.33,41.6 v40.23,35.51 | v173.89,9.91 v173.89,59.13 | v147.07,88.54 145.24,90.37 145.24,101.8 138.53,108.51 138.53,110.49 IC12.9 | v153.62,90.68 169.01,90.68 170.08,89.61 170.08,71.02 IC6.9 | v68.28,88.85 68.28,97.38 v65.53,100.13 | v126.64,106.98 v120.85,106.98
  Bottom 0.152: v34.29,17.98 30.63,14.33 28.19,14.33 27.74,14.78 27.74,15.7 29.11,17.07 29.11,17.68 IC21.15 | 63.86,78.94 65.23,77.57 65.99,77.57 IC23.14 | 63.86,78.94 60.5,78.94 47.09,65.53 v47.09,55.17 | v40.23,35.51 40.23,23.93 41.6,22.55 41.6,20.57 43.13,19.05 IC19.16 | 170.54,6.55 171.15,5.94 171.15,4.12 170.23,3.2 162.15,3.2 161.39,3.96 161.39,5.64 160.17,6.86 137.01,6.86 135.33,5.18 134.72,5.18 IC8.4 | 170.54,6.55 166.57,6.55 IC10.4 | v173.89,59.13 173.89,64.92 169.01,69.8 IC6.9 | 170.54,6.55 v173.89,9.91 | v147.07,88.54 148.28,87.33 151.49,87.33 152.71,88.54 152.71,89.76 v153.62,90.68 | 63.86,78.94 63.86,82.3 68.28,86.72 v68.28,88.85 | v65.53,100.13 65.53,101.8 66.45,102.72 66.45,103.94 69.49,106.98 v120.85,106.98 | v126.64,106.98 129.84,110.19 129.84,111.4 130.45,112.01 136.85,112.01 138.38,110.49 IC12.9
ACO-DATA7  (via drill 0.33)
  Top 0.152: v33.22,22.1 34.59,20.73 36.58,20.73 39.01,23.16 39.01,23.77 41.91,26.67 IC19.19 | IC23.1 60.96,59.13 60.2,58.37 50.14,58.37 48.62,56.84 42.22,56.84 41.6,56.24 41.6,55.63 42.98,54.25 44.2,54.25 45.72,52.73 v45.72,41.91 | v152.09,9.6 167.03,9.6 167.34,9.91 | 167.34,9.91 170.08,12.65 IC10.9 | v175.72,57.91 175.72,6.25 172.97,3.5 172.36,3.5 171.15,4.72 171.15,6.1 167.34,9.91 | v130.91,106.98 133.35,104.55 v135.33,104.55 | v150.27,99.36 151.64,99.36 152.71,98.3 152.71,77.88 160.63,69.95 161.24,69.95 IC6.12 | v89.61,7.47 97.08,7.47 97.69,8.08 111.56,8.08 113.69,10.21 126.34,10.21 128.63,12.5 128.63,13.72 129.08,14.17 v132.89,14.17
  Bottom 0.152: IC21.17 32.46,22.86 v33.22,22.1 | v45.72,41.91 45.72,29.11 43.28,26.67 IC19.19 43.13,26.67 43.13,25.91 41.6,24.38 41.6,23.77 42.22,23.16 47.4,23.16 59.44,11.12 60.05,11.12 61.27,12.34 61.27,13.56 61.87,14.17 62.64,14.17 63.86,12.95 63.86,11.73 66.45,9.14 87.94,9.14 v89.61,7.47 | v152.09,9.6 142.8,9.6 IC8.9 138.23,14.17 v132.89,14.17 | v175.72,57.91 175.41,58.22 170.99,58.22 167.94,61.27 167.94,62.48 166.73,63.7 161.7,63.7 161.09,64.31 161.09,64.92 161.24,65.08 161.24,69.8 IC6.12 | v130.91,106.98 130.91,110.49 IC12.12 | v135.33,104.55 137.77,104.55 137.92,104.7 146.3,104.7 147.68,103.33 147.68,101.96 v150.27,99.36
ADD
  Top 0.152: IC25.1 54.71,102.87 54.71,97.08 56.24,95.56 56.24,94.34 61.42,89.15 65.68,89.15 67.21,87.63 IC4.7
ALU0  (via drill 0.33)
  Top 0.152: IC26.11 102.87,70.41 101.8,69.34 101.8,64.92 101.19,64.31 100.13,64.31 96.16,68.28 96.16,69.49 93.57,72.08 85.95,72.08 78.49,79.55 63.86,79.55 57.91,85.5 v55.47,85.5
  Bottom 0.152: 51.97,85.5 51.97,74.98 44.35,67.36 15.39,67.36 10.21,72.54 9.75,72.54 8.69,73.61 8.69,75.13 X1.B24 | 51.97,85.5 51.97,87.63 IC4.1 | 51.97,85.5 v55.47,85.5
ALU1  (via drill 0.33)
  Top 0.152: v89.15,74.37 83.67,79.86 64.01,79.86 58.06,85.8 56.54,85.8 54.71,87.63 IC4.2 | v96.32,74.37 97.84,74.37 99.36,75.89 99.36,77.11 100.28,78.03 108.05,78.03 108.81,77.27 108.81,75.13 108.36,74.68 106.98,74.68 105.46,76.2 IC26.10 | v39.93,66.75 v32.46,74.22
  Bottom 0.152: v96.32,74.37 v89.15,74.37 | X1.B25 7.62,77.72 9.14,76.2 9.14,75.74 10.21,74.68 12.95,74.68 13.72,73.91 32.16,73.91 v32.46,74.22 | v39.93,66.75 42.06,66.75 42.37,67.06 44.5,67.06 56.08,78.64 56.08,86.26 54.71,87.63 IC4.2
ALU2
  Top 0.152: IC26.9 107.9,76.2 106.38,77.72 102.56,77.72 101.5,76.66 101.5,65.08 101.04,64.62 100.43,64.62 99.36,65.68 99.36,68.89 95.86,72.39 92.05,72.39 83.36,81.08 63.7,81.08 IC4.3 49.84,94.94 45.41,94.94 40.39,99.97 32,99.97 31.55,99.52 31.55,98.3 28.8,95.56 27.58,95.56 24.54,92.51 24.54,84.12 18.14,77.72 10.21,77.72 9.14,76.66 9.14,76.2 8.08,75.13 4.72,75.13 3.96,75.89 3.96,76.5 4.72,77.27 5.03,77.27 6.1,78.33 6.1,78.64 7.62,80.16 X1.B26
ALU-FUNC  (via drill 0.33)
  Top 0.152: v91.75,111.71 91.29,111.71 90.37,112.62 45.41,112.62 45.11,112.93 23.32,112.93 20.57,110.19 14.33,110.19 10.97,106.83 v10.97,100.89 | v7.01,92.66 7.92,92.66 9.14,91.44 9.14,85.5 v9.3,85.34
  Bottom 0.152: IC24.9 90.53,110.49 v91.75,111.71 | v10.97,100.89 10.52,100.89 6.55,96.93 6.55,93.12 v7.01,92.66 | v9.3,85.34 7.77,83.82 X1.B27
AND
  Bottom 0.152: IC13.1 148.9,33.98 | 148.9,33.98 147.68,35.2 146.61,35.2 142.34,39.47 140.21,39.47 138.84,40.84 138.84,42.06 137.47,43.43 134.26,43.43 130.91,46.79 126.64,46.79 126.03,47.4 126.03,56.69 124.66,58.06 124.66,58.67 114.15,69.19 113.08,69.19 106.98,75.29 106.98,77.27 99.36,84.89 99.36,90.53 93.12,96.77 89.31,96.77 84.12,101.96 84.12,103.17 82.91,104.39 79.7,104.39 78.64,103.33 78.64,92.66 77.57,91.59 63.4,91.59 59.74,95.25 IC4.13 | IC13.19 152.4,37.49 148.9,33.98
BDATA0  (via drill 0.33)
  Top 0.152: v25.15,55.17 25.15,46.94 31.09,41 31.09,27.89 29.26,26.06 29.26,25.45 IC21.18 | v25.15,56.69 21.79,60.05 20.57,60.05 19.81,60.81 19.81,74.98 v24.38,79.55 | v16.61,88.24 16.61,88.7 18.75,90.83 18.75,92.35 20.27,93.88 IC33.18 | IC1.11 137.16,74.37 135.48,76.05 135.48,77.72 | 135.48,77.72 135.48,86.11 133.04,88.54 133.04,92.05 v130.15,94.94 | v151.18,83.67 151.18,88.85 IC20.2 | v154.23,80.62 158.65,76.2 IC5.2 | 106.83,14.48 111.56,14.48 v111.71,14.33 | 106.83,14.48 105.31,14.48 104.55,13.72 104.55,12.5 103.17,11.12 97.54,11.12 96.01,12.65 95.25,12.65 IC32.18 | v122.99,20.27 126.34,20.27 126.64,20.57 128.02,20.57 IC9.2 131.37,17.22 134.72,17.22 v135.79,18.29 | IC7.2 159.41,19.05 157.28,21.18 v153.92,21.18 | 106.83,14.48 v106.83,14.33 | 135.48,77.72 137.47,77.72 138.84,76.35 138.84,65.38 140.66,63.55 140.66,55.32 v143.87,52.12 | v43.59,85.8 48.46,85.8 60.81,73.46 v62.18,73.46
  Bottom 0.152: v25.15,56.69 v25.15,55.17 | IC33.18 20.27,93.88 18.75,92.35 18.75,84.12 23.32,79.55 v24.38,79.55 37.34,79.55 v43.59,85.8 | RN4.2 15.24,93.27 13.72,91.75 13.72,91.14 v16.61,88.24 | v130.15,94.94 124.82,94.94 114,105.77 108.36,105.77 108.05,106.07 104.85,106.07 101.65,102.87 V1.2 | v151.18,83.67 v154.23,80.62 154.23,57 153.31,56.08 153.31,51.05 150.72,48.46 150.72,45.87 149.5,44.65 | v111.71,14.33 117.04,14.33 v122.99,20.27 | 153.31,21.79 v153.92,21.18 | 153.31,21.79 138.07,21.79 135.79,19.51 v135.79,18.29 | v106.83,14.33 107.9,15.39 107.9,33.68 106.68,34.9 106.68,53.65 104.24,56.08 104.24,60.2 100.13,64.31 94.49,64.31 92.81,62.64 92.81,59.74 IC28.15 92.66,59.59 91.9,59.59 90.53,58.22 77.72,58.22 74.98,60.96 IC22.10 74.83,60.96 74.83,66.29 72.69,68.43 72.69,70.1 70.26,72.54 63.09,72.54 v62.18,73.46 | 149.5,44.65 149.5,42.52 149.81,42.22 152.71,42.22 153.77,41.15 153.77,36.12 155.91,33.98 155.91,24.38 153.31,21.79 | v143.87,52.12 143.87,47.85 147.07,44.65 149.5,44.65
BDATA1  (via drill 0.33)
  Top 0.152: IC20.4 156.21,85.65 157.89,83.97 157.89,82.75 v162.92,77.72 | v138.68,64.62 139.6,63.7 139.6,62.33 IC1.7 | v149.5,53.19 149.81,52.88 152.71,52.88 154.38,51.21 v156.97,51.21 156.97,50.6 159.11,48.46 159.11,43.43 160.93,41.6 160.93,39.62 158.95,37.64 v153.16,37.64 | v10.82,62.18 v15.24,57.76 | v2.74,93.12 5.03,95.4 14.17,95.4 15.24,96.47 RN4.3 | v15.24,87.78 17.68,90.22 17.68,93.27 20.27,95.86 20.27,96.47 IC33.17 | 70.56,60.96 IC22.12 | 70.56,60.96 75.44,56.08 95.71,56.08 98.75,53.03 98.75,51.21 98.15,50.6 96.01,50.6 | 96.01,50.6 91.59,50.6 90.22,51.97 IC28.1 | v112.32,14.94 105.31,14.94 104.7,14.33 102.56,14.33 101.04,12.8 100.43,12.8 IC32.16 | v121.16,20.27 121.77,20.88 129.54,20.88 131.22,19.2 131.22,17.98 131.67,17.53 132.44,17.53 133.66,18.75 133.66,19.96 134.26,20.57 135.64,20.57 IC9.5 | IC7.5 167.03,19.05 165.51,17.53 156.67,17.53 v153.01,21.18 151.49,22.71 v151.49,23.77 | v96.01,49.53 96.01,50.6 | v102.26,41 103.17,41 110.49,33.68 110.49,23.16 v113.39,20.27 | v39.62,92.2 43.13,92.2 45.57,89.76 46.79,89.76 v63.09,73.46 | v79.86,67.21 79.4,67.21 74.98,62.79 71.78,62.79 70.56,61.57 70.56,60.96
  Bottom 0.152: IC5.5 166.27,76.2 164.74,77.72 v162.92,77.72 162.92,73.3 160.32,70.71 160.32,57.45 160.93,56.84 160.93,54.1 158.04,51.21 v156.97,51.21 | v138.68,64.62 136.7,64.62 136.55,64.77 135.33,64.77 133.04,62.48 133.04,61.27 132.13,60.35 124.05,60.35 114.3,70.1 114.3,84.43 111.4,87.33 111.4,89.92 106.38,94.94 106.38,98.45 104.24,100.58 104.24,102.87 V1.3 | v149.5,53.19 142.65,53.19 140.66,55.17 140.66,61.27 IC1.7 | v15.24,57.76 16.61,56.39 16.61,40.23 27.43,29.41 27.43,22.71 29.11,21.03 29.11,20.42 IC21.16 | v10.82,62.18 10.06,62.18 8.69,63.55 8.69,63.86 7.62,64.92 7.32,64.92 6.1,66.14 6.1,66.45 5.03,67.51 4.72,67.51 2.74,69.49 v2.74,93.12 | v15.24,87.78 9.75,87.78 9.14,88.39 9.14,89.31 10.21,90.37 10.52,90.37 11.58,91.44 11.58,92.81 15.24,96.47 RN4.3 | 113.39,14.94 115.82,14.94 v121.16,20.27 | 113.39,14.94 v112.32,14.94 | v153.01,21.18 139.29,21.18 IC9.5 | v96.01,49.53 96.01,47.24 v102.26,41 | 113.39,14.94 v113.39,20.27 | v39.62,92.2 39.17,92.66 27.43,92.66 23.62,96.47 20.42,96.47 IC33.17 | v63.09,73.46 70.1,73.46 72.24,71.32 74.07,71.32 74.83,70.56 74.83,68.89 76.5,67.21 v79.86,67.21 | v153.16,37.64 153.16,37.34 151.49,35.66 v151.49,23.77
BDATA2  (via drill 0.33)
  Top 0.152: v112.01,10.97 110.34,10.97 109.58,11.73 109.58,12.95 108.36,14.17 107.59,14.17 106.22,12.8 105.46,12.8 IC32.14 | v122.99,16.61 135.94,16.61 136.25,16.31 136.85,16.31 138.07,17.53 138.07,25.76 IC9.10 | IC7.10 167.64,31.09 168.55,32 168.55,33.98 167.94,34.59 v146.46,34.59 144.63,34.59 141.43,37.8 141.43,38.86 v143.1,40.54 | v168.55,72.24 167.94,72.85 167.94,76.5 166.42,78.03 166.42,83.82 IC5.10 | v175.11,27.13 v175.11,64.16 | 103.33,61.42 105,59.74 105.31,59.74 IC28.10 | 103.33,61.42 103.33,63.09 103.63,63.4 v121.92,63.4 | v17.37,103.48 17.83,103.48 19.36,105 21.64,105 v21.95,104.7 | v33.83,24.23 33.83,42.06 34.44,42.67 34.44,44.96 33.98,45.41 33.98,51.05 35.2,52.27 v41.45,52.27 | v50.6,53.49 55.93,53.49 57.61,55.17 61.72,55.17 67.21,60.66 67.21,60.96 IC22.13 | v23.01,85.34 23.01,95.71 20.42,98.3 20.42,99.06 IC33.16 | v24.99,80.16 24.99,73.91 20.12,69.04 20.12,63.09 21.34,61.87 23.93,61.87 28.96,56.84 30.18,56.84 32.61,54.41 v32.61,53.95 | 103.33,61.42 101.96,61.42 101.65,61.11 100.74,61.11 99.36,62.48 72.08,62.48 71.17,61.57 v71.17,61.27 | v136.4,52.27 133.04,55.63 133.04,61.27 IC1.4
  Bottom 0.152: IC5.10 166.27,83.82 161.24,88.85 IC20.6 | v112.01,10.97 117.35,10.97 v122.99,16.61 | v146.46,34.59 141.88,39.17 135.03,39.17 131.22,35.36 131.22,32.61 IC9.10 | v168.55,72.24 170.54,70.26 170.54,68.73 v175.11,64.16 | v175.11,27.13 173.13,25.15 169.16,25.15 IC7.10 | IC1.4 131.98,62.18 130.45,60.66 124.21,60.66 121.92,62.94 v121.92,63.4 114.61,70.71 114.61,87.94 109.58,92.96 109.58,98.6 106.68,101.5 V1.4 | RN4.4 16.46,99.06 17.37,99.97 v17.37,103.48 | v21.95,104.7 21.95,100.58 20.42,99.06 IC33.16 | v33.83,24.23 33.83,20.12 29.26,15.54 29.26,15.24 IC21.14 | v50.6,53.49 45.26,53.49 44.04,52.27 v41.45,52.27 34.75,52.27 33.07,53.95 v32.61,53.95 | v23.01,85.34 23.01,82.14 v24.99,80.16 | v71.17,61.27 71.17,61.57 70.26,62.48 68.89,62.48 67.36,60.96 IC22.13 | v143.1,40.54 143.1,42.98 142.04,44.04 141.58,44.04 138.07,47.55 138.07,50.6 v136.4,52.27
BDATA3  (via drill 0.33)
  Top 0.152: IC33.15 20.27,101.5 19.51,101.5 18.29,100.28 v16.76,100.28 16.31,100.28 16,99.97 7.01,99.97 v1.52,94.49 | v38.86,59.28 47.55,59.28 48.62,58.22 49.53,58.22 50.75,59.44 v60.35,59.44 | IC21.12 29.11,10.21 28.5,10.21 21.79,16.92 20.57,16.92 18.9,18.59 v18.9,53.19 14.48,57.61 v13.41,57.61 | IC7.13 160.63,26.67 162.15,25.15 167.94,25.15 169.32,26.52 169.32,30.33 171.45,32.46 171.45,45.11 168.55,48.01 168.55,49.23 163.37,54.41 162.15,54.41 161.7,54.86 161.7,57.76 162.92,58.98 162.92,64.31 165.51,66.9 165.51,85.34 | 165.51,85.34 165.51,88.09 166.27,88.85 IC20.8 | IC5.13 159.41,83.82 160.93,85.34 165.51,85.34 | 116.13,40.54 119.02,43.43 119.79,43.43 121.01,42.22 121.01,37.03 123.6,34.44 123.6,32.61 IC9.13 132.13,24.08 v132.13,23.77 | 116.13,40.54 110.8,35.2 110.8,32.16 114,28.96 114,11.73 113.39,11.12 112.78,11.12 111.25,12.65 110.49,12.65 IC32.12 | v109.12,64.01 118.57,64.01 124.36,69.8 IC1.16 | 116.13,40.54 110.64,46.02 v110.64,48.31 | v159.56,22.1 154.08,22.1 151.79,24.38 v149.81,24.38 | v93.42,57.91 106.22,57.91 107.9,59.59 IC28.9
  Bottom 0.152: v16.76,100.28 15.54,101.5 15.24,101.5 RN4.5 | v18.9,53.19 18.9,57.61 20.57,59.28 v38.86,59.28 | v60.35,59.44 60.66,59.44 62.18,60.96 IC22.15 62.94,60.96 69.04,54.86 70.26,54.86 71.48,53.65 71.48,52.43 72.08,51.82 75.29,51.82 76.5,53.03 76.5,54.25 78.79,56.54 92.05,56.54 v93.42,57.91 | v1.52,94.49 1.52,65.53 5.03,62.03 5.49,62.03 6.55,60.96 6.55,60.5 7.62,59.44 8.08,59.44 9.14,58.37 9.14,57.91 9.75,57.3 13.11,57.3 v13.41,57.61 | v109.12,64.01 108.05,62.94 108.05,59.74 IC28.9 109.12,58.52 109.12,51.66 110.64,50.14 v110.64,48.31 | IC1.16 123.6,70.71 123.6,82.6 114.61,91.59 114.61,95.56 109.27,100.89 109.27,102.87 V1.5 | IC7.13 160.02,22.55 v159.56,22.1 | v149.81,24.38 149.2,23.77 v132.13,23.77
BDATA4  (via drill 0.33)
  Top 0.152: v107.14,1.68 110.49,5.03 IC32.9 110.49,5.18 112.17,6.86 123.44,6.86 129.24,12.65 129.54,12.65 IC8.13 129.54,12.8 v132.59,9.75 | v158.19,11.12 159.72,12.65 160.02,12.65 IC10.13 | 149.81,97.23 150.27,96.77 150.27,77.72 157.89,70.1 157.89,63.09 IC6.2 | 149.81,97.23 v148.28,98.75 | V1.9 112.47,110.49 116.59,106.38 v127.56,106.38 | v129.24,106.38 132.44,103.17 132.44,100.58 136.25,96.77 136.25,87.94 137.77,86.41 v138.84,86.41 | v151.94,98.15 150.72,98.15 149.81,97.23 | RN4.6 15.24,104.09 15.85,104.09 17.07,102.87 19.05,102.87 IC33.14 20.42,104.09 22.25,104.09 26.06,107.9 46.79,107.9 47.24,107.44 77.57,107.44 77.72,107.59 v78.18,107.59 | 75.89,77.11 76.2,77.42 IC23.10 75.89,77.11 | 75.89,77.11 70.71,71.93 68.28,71.93 67.36,71.02 67.36,69.34 66.45,68.43 66.45,60.35 61.57,55.47 51.66,55.47 49.99,53.8 49.99,52.27 50.29,51.97 54.1,51.97 61.57,44.5 62.18,44.5 IC29.15 | v34.44,98.3 37.8,94.94 40.84,94.94 42.98,92.81 48.77,92.81 53.65,87.94 53.65,86.41 55.17,84.89 58.06,84.89 64.01,78.94 74.07,78.94 75.89,77.11 | v61.72,1.68 61.72,3.66 61.27,4.12 61.27,9.3 62.79,10.82 64.77,10.82 65.68,11.73 65.68,32.46 v63.09,35.05
  Bottom 0.152: v107.14,1.68 v61.72,1.68 38.41,1.68 33.98,6.1 33.98,6.71 34.59,7.32 35.81,7.32 37.03,8.53 37.03,9.3 36.58,9.75 34.9,9.75 33.53,11.12 28.5,11.12 26.06,13.56 20.57,13.56 20.12,13.11 20.12,12.34 21.49,10.97 21.49,10.21 IC21.9 | v158.19,11.12 154.53,11.12 151.79,8.38 133.96,8.38 v132.59,9.75 | 139.29,85.95 140.97,87.63 140.97,97.08 142.65,98.75 v148.28,98.75 | 139.29,85.95 IC2.11 | v129.24,106.38 v127.56,106.38 | 139.29,85.95 v138.84,86.41 | IC20.11 171.45,101.04 172.36,101.96 172.36,107.75 169.77,110.34 169.77,111.56 169.32,112.01 155.91,112.01 154.53,110.64 154.53,105.61 152.71,103.78 152.71,98.91 v151.94,98.15 | v34.44,98.3 34.29,98.15 19.36,98.15 18.75,98.75 18.75,101.96 20.27,103.48 20.27,104.09 IC33.14 | v78.18,107.59 78.49,107.29 108.51,107.29 111.71,110.49 V1.9 | v63.09,35.05 63.09,43.59 IC29.15
BDATA5  (via drill 0.33)
  Top 0.152: v33.22,20.42 36.73,20.42 39.32,23.01 39.32,23.62 41.45,25.76 v59.13,25.76 | v57.91,72.85 65.84,72.85 70.41,77.42 71.02,77.42 IC23.12 | v57.91,54.1 57.3,53.49 57.3,51.21 63.09,45.41 63.09,40.23 IC29.1 | v128.02,3.5 v112.32,3.5 | 166.73,96.16 IC20.13 166.42,96.47 | 166.73,96.16 172.97,89.92 172.97,69.49 166.42,62.94 166.42,62.33 IC6.5 | RN4.7 IC33.13 21.79,106.68 25.3,110.19 50.14,110.19 52.27,108.05 77.27,108.05 78.18,108.97 95.71,108.97 99.06,112.32 107.29,112.32 109.12,110.49 V1.10 109.27,110.49 111.1,112.32 114.76,112.32 116.13,110.95 119.79,110.95 121.77,112.93 135.33,112.93 137.47,110.8 v137.47,108.05 137.47,100.58 140.66,97.38 140.66,86.26 v140.36,85.95 | 166.73,96.16 172.36,101.8 172.36,111.4 171.45,112.32 144.63,112.32 v142.19,109.88 | v174.5,56.69 v174.5,13.56 | v59.44,22.4 61.27,20.57 v61.27,18.14 | v90.98,6.86 92.81,6.86 94.03,5.64 94.03,3.96 94.79,3.2 103.48,3.2 105.31,5.03 IC32.7
  Bottom 0.152: IC21.7 11.28,15.24 9.14,17.37 9.14,28.35 9.75,28.96 22.4,28.96 27.13,24.23 27.13,20.57 28.35,19.36 32.16,19.36 v33.22,20.42 | 59.44,25.76 60.66,26.98 60.66,35.81 59.74,36.73 IC29.1 | v57.91,54.1 v57.91,72.85 | v112.32,3.5 107.59,3.5 106.07,5.03 105.46,5.03 IC32.7 | 129.54,5.03 v128.02,3.5 | 160.02,5.03 159.26,5.03 157.12,2.9 131.67,2.9 129.54,5.03 | 129.54,5.03 IC8.2 | v140.36,85.95 140.36,85.04 140.66,84.73 140.66,77.11 139.75,76.2 IC2.7 | v142.19,109.88 140.36,108.05 v137.47,108.05 | 160.02,5.03 161.09,3.96 161.09,3.81 162,2.9 170.38,2.9 171.75,4.27 171.75,6.86 174.5,9.6 v174.5,13.56 | v174.5,56.69 173.74,56.69 172.52,57.91 170.69,57.91 IC6.5 | 160.02,5.03 IC10.2 | v59.44,22.4 59.44,25.76 | v61.27,18.14 66.45,12.95 66.45,11.73 68.73,9.45 88.54,9.45 90.98,7.01 v90.98,6.86 | 59.44,25.76 v59.13,25.76
BDATA6  (via drill 0.33)
  Top 0.152: v95.86,86.11 95.86,86.41 103.78,94.34 | 103.78,94.34 104.55,95.1 104.55,98.91 108.05,102.41 108.05,104.85 108.36,105.16 108.36,106.83 106.68,108.51 106.68,108.97 | V1.11 106.68,108.97 | v131.52,81.84 129.69,81.84 127.86,83.67 127.86,84.89 126.64,86.11 110.19,86.11 108.81,87.48 108.81,89.31 103.78,94.34 | v148.13,106.07 154.84,106.07 157.12,103.78 157.12,102.56 161.24,98.45 161.24,96.62 IC20.15 | v134.87,108.97 130.45,108.97 129.24,110.19 129.24,111.4 128.02,112.62 121.92,112.62 119.94,110.64 115.98,110.64 114.61,112.01 111.4,112.01 110.19,110.8 110.19,109.58 109.58,108.97 106.68,108.97 | IC10.5 167.64,5.03 166.12,3.5 157.12,3.5 v156.06,4.57 143.56,4.57 141.88,2.9 v109.27,2.9 | RN4.8 15.24,109.27 20.27,109.27 IC33.12 | v39.17,4.88 22.4,4.88 17.68,9.6 v17.68,15.85 11.73,21.79 v5.94,21.79 | v73.76,3.5 69.49,3.5 68.58,4.42 68.58,45.11 69.49,46.02 72.69,46.02 74.22,44.5 74.83,44.5 IC29.10 | v109.73,51.97 107.59,49.84 v104.85,49.84
  Bottom 0.152: IC6.10 166.42,69.95 166.42,74.37 167.34,75.29 167.34,89.76 161.39,95.71 161.39,96.47 IC20.15 | v95.86,86.11 93.73,86.11 | 93.73,86.11 77.72,86.11 69.19,77.57 68.58,77.57 IC23.13 | v131.52,81.84 131.98,81.38 131.98,76.2 IC2.4 | v148.13,106.07 147.22,106.07 141.28,112.01 140.66,112.01 139.29,110.64 139.29,109.42 138.84,108.97 v134.87,108.97 | v156.06,4.57 154.08,6.55 139.29,6.55 137.92,5.18 137.16,5.18 IC8.5 | v17.68,15.85 21.49,19.66 21.49,20.27 IC21.5 | v39.17,4.88 48.92,4.88 51.51,2.29 73.3,2.29 73.61,1.98 74.52,1.98 | 74.52,1.98 97.23,1.98 IC32.5 100.43,5.03 102.56,2.9 104.55,2.9 | v73.76,3.5 74.07,3.2 74.22,3.2 74.52,2.9 74.52,1.98 | RN4.8 15.24,109.88 16.76,111.4 16.76,112.17 16.31,112.62 14.17,112.62 5.79,104.24 5.79,100.13 0.91,95.25 0.91,25.6 4.72,21.79 v5.94,21.79 | 104.55,2.9 v109.27,2.9 | 93.73,86.11 93.73,88.85 94.03,89.15 94.64,89.15 106.68,77.11 106.68,67.36 109.73,64.31 v109.73,51.97 | v104.85,49.84 104.85,34.14 105,33.98 105,19.05 104.55,18.59 104.55,2.9
BDATA7  (via drill 0.33)
  Top 0.152: v150.57,8.99 151.79,10.21 165.2,10.21 167.64,12.65 IC10.10 | v81.53,30.02 81.53,39.01 77.57,42.98 77.57,44.35 IC29.9 | v126.03,8.53 132.28,8.53 136.4,12.65 137.16,12.65 IC8.10 | v122.83,8.53 112.47,8.53 111.56,7.62 97.69,7.62 95.25,5.18 IC32.3 | v107.75,105.46 104.24,108.97 104.24,110.49 V1.12 | v148.13,105.16 149.5,103.78 149.5,102.56 155.45,96.62 156.21,96.62 IC20.17 | v135.18,105.46 133.96,105.46 v133.66,105.16 | v18.29,28.35 18.29,51.82 v11.43,58.67 | IC33.11 20.27,111.86 15.24,111.86 RN4.9 | 26.82,82.91 18.29,74.37 v18.29,66.75 | 26.82,82.91 29.72,85.8 29.72,90.07 32.46,92.81 39.93,92.81 40.23,92.51 46.48,92.51 47.24,91.75 47.24,90.53 53.19,84.58 55.78,84.58 62.79,77.57 63.4,77.57 IC23.15 | v74.68,109.27 70.56,109.27 70.26,108.97 52.27,108.97 v49.23,112.01 | v72.24,49.68 60.5,49.68 57.91,52.27 v57.91,53.19 | v47.7,65.08 46.02,65.08 43.43,67.67 42.06,67.67 26.82,82.91
  Bottom 0.152: v150.57,8.99 141.58,8.99 137.92,12.65 137.16,12.65 IC8.10 | v81.53,30.02 81.99,30.02 85.04,26.98 96.77,26.98 97.38,26.36 97.38,16.76 93.57,12.95 93.57,7.77 91.75,5.94 91.75,4.12 92.35,3.5 93.73,3.5 95.25,5.03 IC32.3 | v122.83,8.53 v126.03,8.53 | IC6.13 158.65,69.95 158.65,74.37 157.43,75.59 157.43,95.25 156.21,96.47 IC20.17 | v107.75,105.46 113.84,105.46 124.36,94.94 124.36,94.34 | 124.36,94.34 124.36,83.82 IC2.16 | v148.13,105.16 135.48,105.16 v135.18,105.46 | v133.66,105.16 131.67,103.17 131.67,97.99 130.76,97.08 130.76,94.64 130.45,94.34 124.36,94.34 | v18.29,28.35 21.18,25.45 21.49,25.45 IC21.3 | 10.82,59.28 10.21,59.89 9.75,59.89 8.69,60.96 8.69,61.42 7.62,62.48 7.16,62.48 6.1,63.55 6.1,64.01 5.18,64.92 4.72,64.92 2.13,67.51 2.13,96.01 13.72,107.59 13.72,110.19 15.24,111.71 RN4.9 | 10.82,59.28 v11.43,58.67 | 10.82,59.28 v18.29,66.75 | V1.12 103.48,110.49 101.65,112.32 77.42,112.32 74.68,109.58 v74.68,109.27 | v49.23,112.01 47.4,112.01 46.79,112.62 21.18,112.62 IC33.11 | v72.24,49.68 IC29.9 | v57.91,53.19 54.41,56.69 54.41,58.37 v47.7,65.08
BDATA8  (via drill 0.33)
  Top 0.152: IC35.18 38.1,94.03 33.07,94.03 RN3.2 29.41,90.37 29.41,85.95 17.68,74.22 17.68,57.91 21.34,54.25 22.55,54.25 23.16,53.65 23.16,33.98 20.12,30.94 20.12,19.96 21.34,18.75 22.55,18.75 27.74,13.56 27.74,12.34 28.96,11.12 33.53,11.12 34.44,10.21 37.49,10.21 42.82,15.54 47.7,15.54 57.3,25.15 59.44,25.15 IC30.15 | v110.03,73.15 110.03,68.73 105.31,64.01 100.28,64.01 v99.36,63.09 | v87.33,43.43 87.33,39.62 93.88,33.07 IC34.18
  Bottom 0.152: IC30.15 62.33,27.89 64.16,26.06 67.36,26.06 68.89,27.58 68.89,30.94 73.76,35.81 73.76,37.95 74.52,38.71 88.24,38.71 93.88,33.07 IC34.18 | V2.2 102.87,83.67 110.03,76.5 v110.03,73.15 | v99.36,63.09 96.16,59.89 96.16,58.52 91.14,53.49 91.14,47.24 v87.33,43.43
BDATA9  (via drill 0.33)
  Top 0.152: IC34.16 99.06,33.22 93.42,38.86 v93.42,39.32 98.6,44.5 98.6,48.46 101.19,51.05 101.19,52.73 104.24,55.78 113.08,55.78 113.39,55.47 113.39,54.86 112.78,54.25 v111.25,54.25 | v109.12,71.17 v109.12,74.07 | v42.98,93.73 40.23,96.47 38.1,96.47 IC35.17 | v42.98,90.37 42.98,71.63 48.46,66.14 v48.46,63.4 | v55.32,22.25 57.76,22.25 IC30.1
  Bottom 0.152: RN3.3 33.07,96.62 38.1,96.62 IC35.17 | v93.42,39.32 93.42,36.58 94.94,35.05 94.94,32.16 94.34,31.55 93.57,31.55 93.12,32 93.12,33.22 87.94,38.41 74.68,38.41 74.07,37.8 74.07,35.66 71.48,33.07 71.48,27.74 69.49,25.76 65.84,25.76 60.5,20.42 59.74,20.42 IC30.1 | V2.3 104.7,87.63 103.17,89.15 102.56,89.15 101.96,88.54 101.96,84.12 109.12,76.96 v109.12,74.07 | v109.12,71.17 109.12,70.56 108.81,70.26 108.81,65.68 110.03,64.47 110.03,54.56 110.34,54.25 v111.25,54.25 | v42.98,90.37 v42.98,93.73 | v48.46,63.4 48.46,57.45 55.32,50.6 v55.32,22.25
BDATA10  (via drill 0.33)
  Top 0.152: v90.07,24.84 90.07,24.38 91.75,22.71 98.3,22.71 100.74,25.15 100.74,26.36 101.8,27.43 v103.48,27.43 | RN3.4 IC35.16 38.56,99.06 44.5,93.12 51.05,93.12 55.47,88.7 55.47,87.48 56.84,86.11 58.22,86.11 63.86,80.47 v73,80.47 | 107.9,86.41 107.9,87.63 V2.4 | 107.9,86.41 99.36,77.88 96.16,77.88 95.86,78.18 v95.86,79.1 | v104.24,53.19 104.24,53.8 105.31,54.86 v110.64,54.86 | v110.64,67.82 110.64,68.43 116.13,73.91 116.13,81.69 112.01,85.8 108.51,85.8 107.9,86.41
  Bottom 0.152: v90.07,24.84 90.07,24.69 89.31,23.93 87.63,23.93 82.14,29.41 77.11,29.41 75.74,28.04 74.98,28.04 IC30.10 | v103.48,27.43 103.48,32.31 104.09,32.92 IC34.14 104.24,33.07 v104.24,53.19 | v95.86,79.1 74.37,79.1 v73,80.47 | v110.64,67.82 v110.64,54.86
BDATA11  (via drill 0.33)
  Top 0.152: 96.16,34.59 95.56,33.98 95.56,32.77 94.34,31.55 87.33,31.55 83.82,28.04 77.57,28.04 IC30.9 | 96.16,34.59 96.77,34.59 97.38,33.98 97.38,32.31 99.82,29.87 v101.04,29.87 | v101.96,31.24 107.44,31.24 IC34.12 | v71.02,102.11 70.26,101.35 61.87,101.35 60.66,102.56 60.66,103.78 60.05,104.39 47.85,104.39 46.02,102.56 39.01,102.56 38.1,101.65 | 38.1,101.65 33.07,101.65 RN3.5 | 38.1,101.65 IC35.15 | v96.16,34.75 96.16,34.59 | v101.35,61.72 103.33,63.7 105.46,63.7 111.56,69.8 v111.56,76.5
  Bottom 0.152: v101.04,29.87 101.04,30.33 v101.96,31.24 | v71.02,102.11 75.29,106.38 97.38,106.38 99.97,103.78 99.97,102.56 101.65,100.89 101.65,94.64 107.14,89.15 108.36,89.15 109.88,87.63 V2.5 111.56,86.56 v111.56,76.5 | v96.16,34.75 96.16,42.98 94.34,44.81 94.34,53.03 99.52,58.22 100.74,58.22 101.35,58.83 v101.35,61.72
BDATA12  (via drill 0.33)
  Top 0.152: v62.33,9.45 62.33,6.86 63.86,5.33 63.86,4.12 66.9,1.07 103.33,1.07 106.98,4.72 106.98,6.71 v107.29,7.01 111.86,7.01 112.78,7.92 v118.72,7.92 | 38.1,104.24 33.07,104.24 RN3.6 | v113.84,108.2 112.93,107.29 112.93,95.25 V2.9 | v55.02,113.23 114.3,113.23 115.98,111.56 v116.43,111.56 118.11,113.23 137.62,113.23 139.29,111.56 139.29,110.34 145.54,104.09 145.54,100.13 147.68,97.99 147.68,83.97 147.37,83.67 147.37,48.77 143.87,45.26 130.91,45.26 v128.32,42.67 | v48.16,106.38 47.24,106.38 45.87,105 38.86,105 38.1,104.24 | 38.1,104.24 IC35.14
  Bottom 0.152: v62.33,9.45 62.33,12.65 IC31.15 | v107.29,7.01 107.29,10.21 109.12,12.04 109.12,25.3 IC34.9 | v113.84,108.2 116.43,110.8 v116.43,111.56 | v48.16,106.38 v55.02,113.23 | v118.72,7.92 118.72,8.38 125.73,15.39 125.73,38.71 128.32,41.3 v128.32,42.67
BDATA13  (via drill 0.33)
  Top 0.152: v76.96,6.86 81.53,6.86 89.61,14.94 104.09,14.94 106.38,17.22 106.38,23.16 IC34.7 | v106.38,99.36 V2.10 | v101.35,104.7 v104.39,104.7 | v99.82,106.07 99.82,107.59 100.13,107.9 100.13,108.51 99.82,108.81 96.01,108.81 94.18,106.98 47.24,106.98 46.63,107.59 39.01,107.59 IC35.13 RN3.7 | v104.09,29.72 102.56,29.72 99.97,32.31 99.97,39.62 99.82,39.78 99.82,49.23 101.96,51.36 101.96,53.03 104.39,55.47 112.47,55.47 v112.78,55.17 | v115.52,70.87 v113.23,68.58
  Bottom 0.152: v76.96,6.86 72.24,6.86 71.48,6.1 71.48,4.88 70.1,3.5 61.87,3.5 60.35,5.03 59.74,5.03 IC31.1 | v106.38,99.36 106.38,100.89 105,102.26 105,104.09 v104.39,104.7 | v101.35,104.7 99.97,106.07 v99.82,106.07 | v104.09,29.72 104.09,25.45 IC34.7 | v112.78,55.17 112.78,55.63 113.23,56.08 v113.23,68.58 | v115.52,70.87 115.52,80.47 116.43,81.38 116.43,89.31 V2.10
BDATA14  (via drill 0.33)
  Top 0.152: v94.34,23.32 97.08,23.32 99.06,25.3 IC34.5 | RN3.8 33.07,109.27 38.1,109.27 IC35.12 38.1,109.12 38.86,108.36 46.79,108.36 47.4,107.75 77.42,107.75 78.03,108.36 v79.25,108.36 | v105.77,105.46 102.72,108.51 v102.72,108.66 | v64.16,18.14 64.16,18.59 63.09,19.66 63.09,21.34 59.89,24.54 v57.91,24.54 | v58.83,76.35 58.83,76.81 v48.01,87.63 | v48.01,99.97 v48.01,98.15
  Bottom 0.152: v94.34,23.32 82.14,11.12 77.11,11.12 75.59,12.65 74.98,12.65 IC31.10 74.83,12.8 74.22,12.8 68.89,18.14 v64.16,18.14 | v105.77,105.46 105.77,101.96 107.9,99.82 107.9,95.25 V2.11 | v102.72,108.66 99.97,108.66 99.82,108.81 97.84,108.81 97.38,108.36 v79.25,108.36 | v57.91,24.54 57.91,49.68 60.66,52.43 60.66,57 58.83,58.83 v58.83,76.35 | v48.01,98.15 v48.01,87.63 | v48.01,99.97 48.01,100.74 47.24,101.5 47.24,106.98 45.87,108.36 38.86,108.36 38.1,109.12 IC35.12
BDATA15  (via drill 0.33)